# Altium PCB boardR2.PcbDoc
Units mil, origin at the board's own origin, x right, y up, seen from the top; angles counter-clockwise.
Board outline 2162 x 3540 mil, 2 copper layers (Top Layer, Bottom Layer); 41 components, 40 nets, 163 pads, 4 vias.
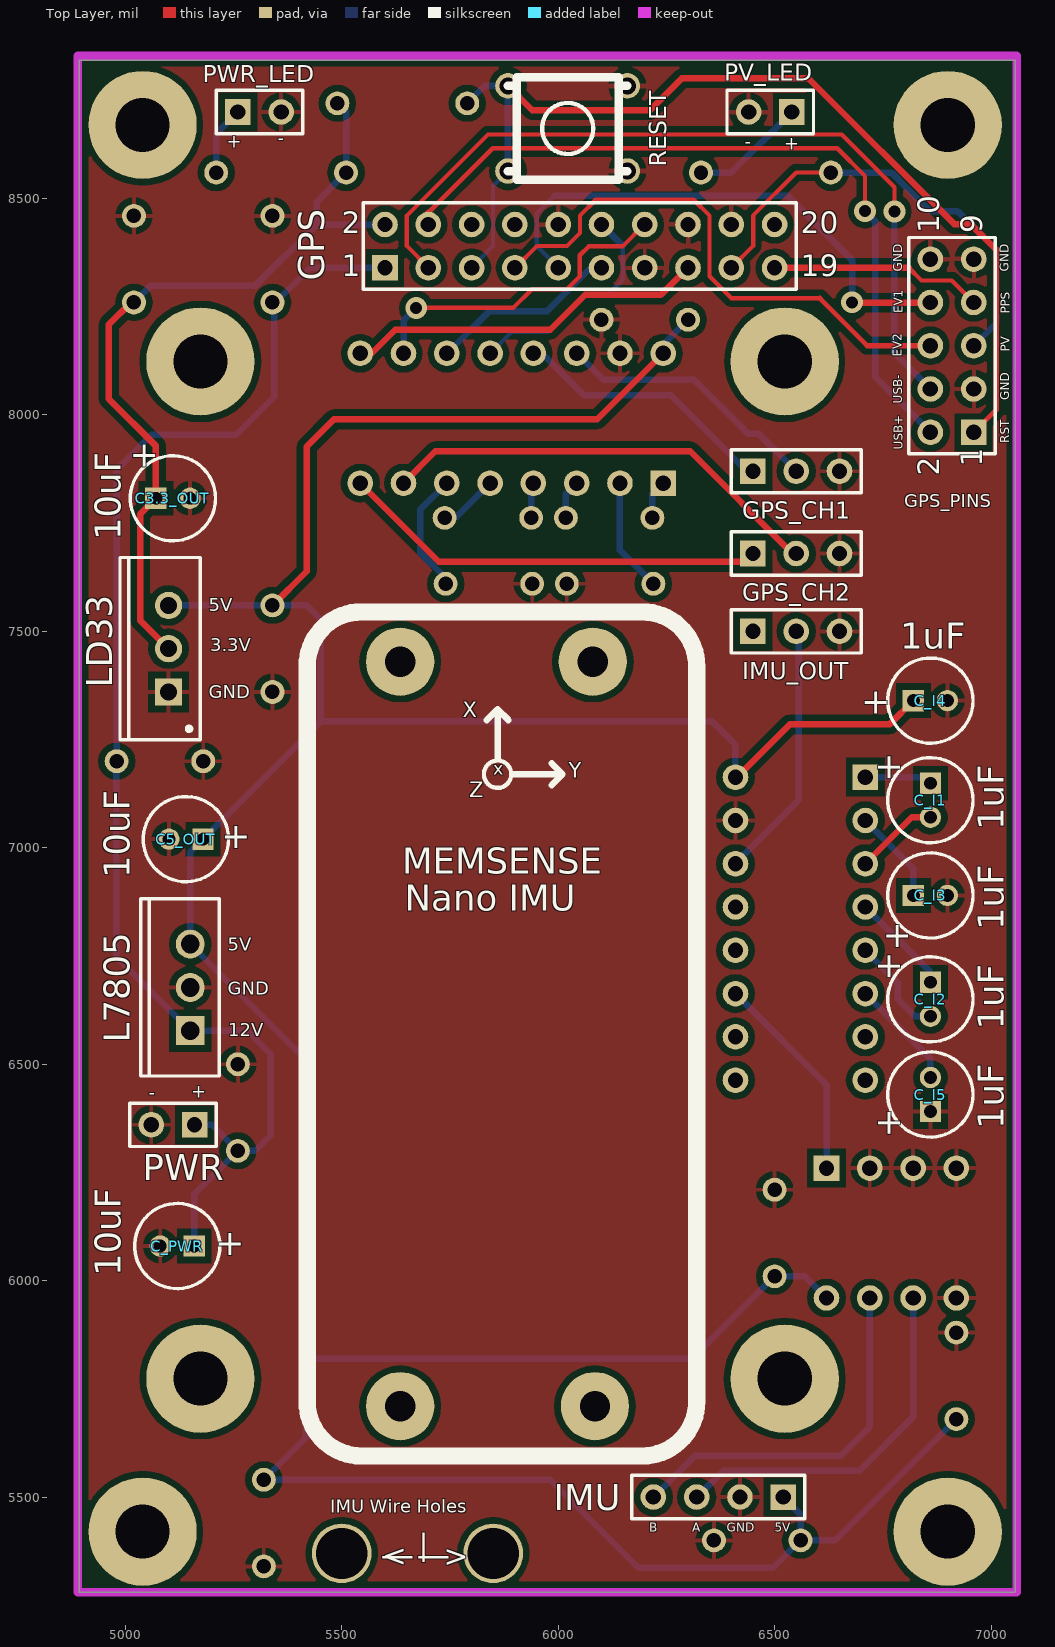
[diagram p0: Top Layer view]
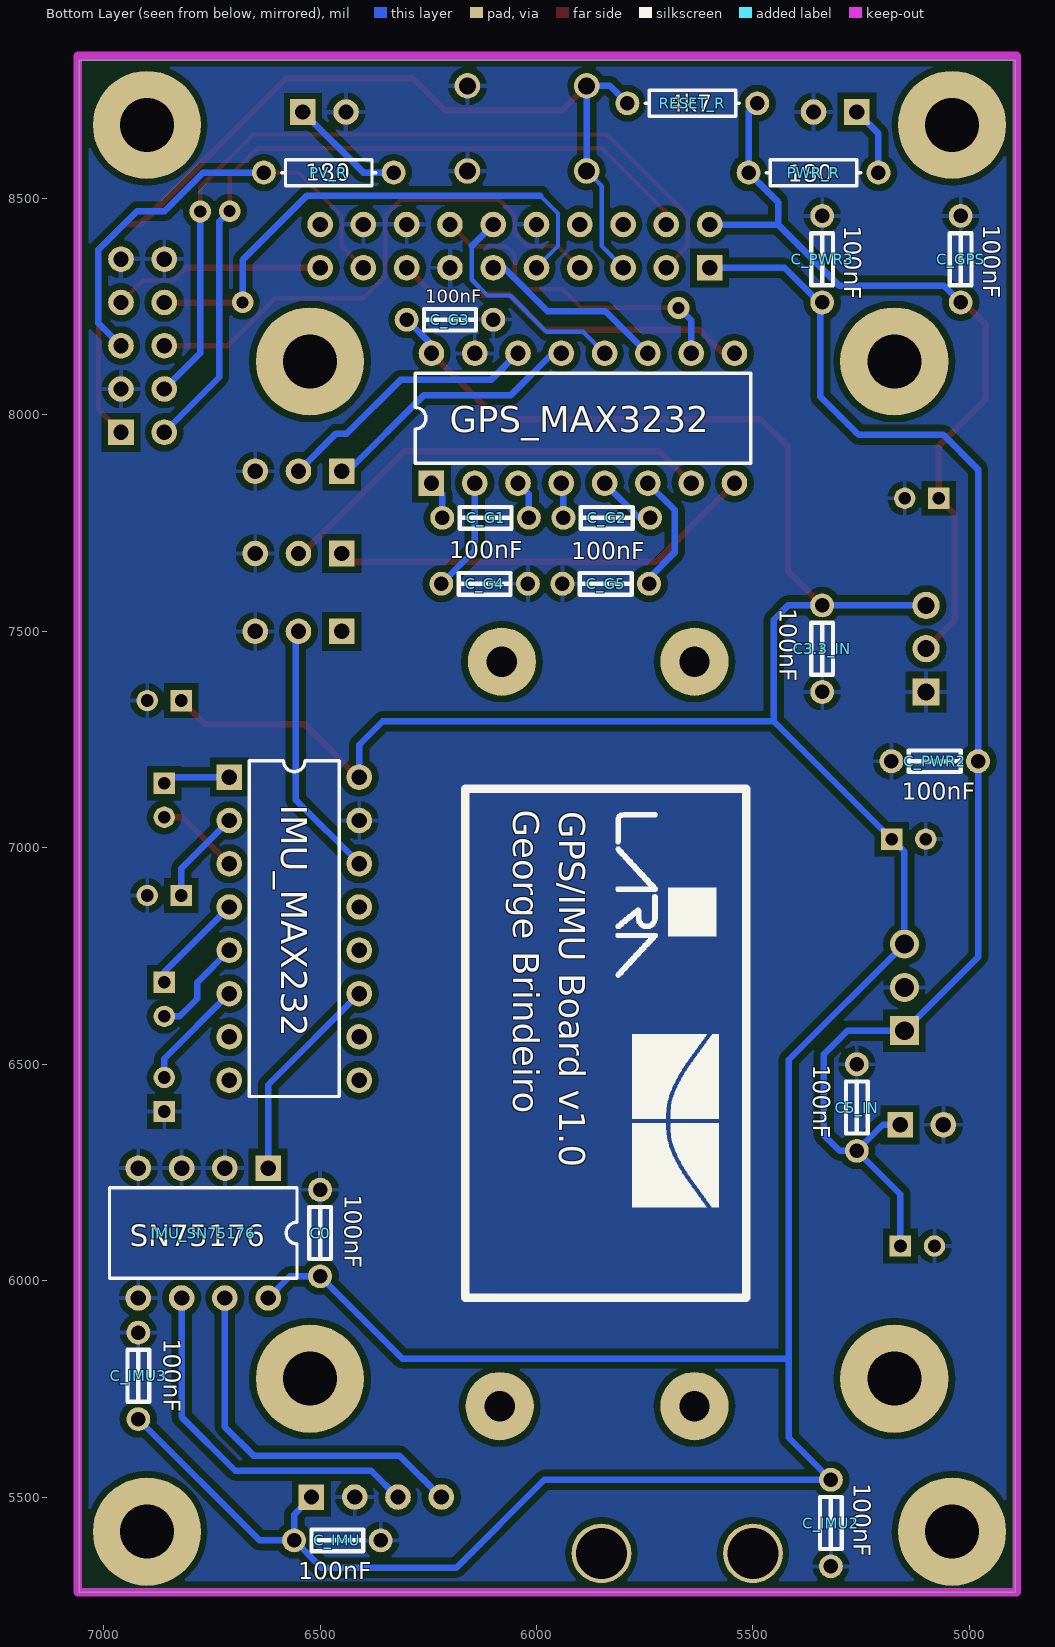
[diagram p1: Bottom Layer view, seen from below]

## Layer stack, top to bottom
Top Layer: signal copper 1.4
Dielectric: dielectric 12.6, FR-4, Dk 4.8
Bottom Layer: signal copper 1.4

## Board outline
4894,5280 7056,5280 7056,8820 4894,8820

## Design rules (kind name [scope] priority, off if disabled: settings)
Clearance [All] p1: gap=15
PolygonConnect [All] p1: connectstyle=Relief reliefconductorwidth=10 reliefentries=4 polygonreliefangle="90 Angle"
RoomDefinition schematic [InComponentClass('schematic')] p1: confinementstyle=ConfineIn formatcopy=TRUE lockcomponents=FALSE outline 7192,5210 7192,8910 4800,8910 4800,5210
RoutingLayers RoutingLayers_1 [All] p1: top layer_v5=TRUE bottom layer_v5=TRUE
RoutingLayers [All] p2: top layer_v5=TRUE bottom layer_v5=TRUE
RoutingTopology RoutingTopology_1 [(InNet('3.3V') OR InNet('5V') OR InNet('12V'))] p1: topology=Starburst
RoutingTopology [All] p2: topology=Shortest
RoutingVias [All] p1: holewidth=28 width=50 viastyle="Through Hole" minholewidth=28 minwidth=50 maxholewidth=28 maxwidth=50
SilkscreenOverComponentPads [All] p1: minsilkscreentomaskgap=10
SolderMaskExpansion [All] p1: expansion=4
TestPointUsage [All] p1: valid=0 allowmultiple=FALSE
Testpoint [All] p1: side=15 testpointundercomponent=TRUE minsize=40 maxsize=100 preferedsize=60 minholesize=0 maxholesize=40 preferedholesize=32 testpointgrid=1 style=1023 order=0123456789
Width Width_1 [(InNet('3.3V') OR InNet('5V') OR InNet('12V'))] p1: maxlimit=20 minlimit=10 preferedwidth=15
Width [All] p2: maxlimit=20 minlimit=10 preferedwidth=12
21 further rules are at their usual default settings.

## Components (designator, comment, footprint, x,y, rotation, side; value= is the part's Value field where it differs from the comment)
C0 "100nF" C_NANO_HOLES 6500,6210 r270 bottom
C3.3_IN "100nF" C_NANO_HOLES 5340,7560 r270 bottom
C3.3_OUT "10uF" B 5110,7807.48 r0 top
C5_IN "100nF" C_NANO_HOLES 5260,6300 r90 bottom
C5_OUT "10uF" B 5140,7020 r180 top
C_G1 "100nF" C_NANO_HOLES 6017.72,7762.44 r0 bottom
C_G2 "100nF" C_NANO_HOLES 5737.72,7762.44 r0 bottom
C_G3 "100nF" C_NANO_HOLES 6100,8220 r0 bottom
C_G4 "100nF" C_NANO_HOLES 6020,7610 r0 bottom
C_G5 "100nF" C_NANO_HOLES 5940,7610 r180 bottom
C_GPS "100nF" C_NANO_HOLES 5020,8460 r270 bottom
C_I1 "1uF" B 6860,7110 r270 top
C_I2 "1uF" B 6860,6650 r270 top
C_I3 "1uF" B 6860,6890 r0 top
C_I4 "1uF" B 6860,7340 r0 top
C_I5 "1uF" B 6860,6430 r90 top
C_IMU "100nF" C_NANO_HOLES 6360,5400 r0 bottom
C_IMU2 "100nF" C_NANO_HOLES 5320,5340 r90 bottom
C_IMU3 "100nF" C_NANO_HOLES 6920,5880 r270 bottom
C_PWR "10uF" B 5120,6080 r180 top
C_PWR2 "100nF" C_NANO_HOLES 5180,7200 r180 bottom
C_PWR3 "100nF" C_NANO_HOLES 5340,8460 r270 bottom
GPS "Header 10X2" HDR2X10 5600,8340 r0 top
GPS_CH1 "MHDR1X3" HDR1X3 6450,7870 r0 top
GPS_CH2 "MHDR1X3" HDR1X3 6450,7680 r0 top
GPS_MAX3232 "MAX3232EEPE" PE16 5892.72,7992.44 r180 bottom
GPS_PINS "Header 5X2" HDR2X5 6960,7960 r90 top
IMU "Header 4" HDR1X4 6520,5500 r180 top
IMU_MAX232 "MAX232ACPE" PE16A 6559.69,6813.15 r270 bottom
IMU_OUT "MHDR1X3" HDR1X3 6450,7500 r0 top
IMU_SN75176 "SN75176" P008 6770,6110 r0 bottom
L7805 "L7805ACV" TO220ABN 5150,6677.48 r90 top
LD33 "LD33V" T03B 5100,7460 r90 top
PV_LED "LED" HDR1X2 6540,8700 r180 top
PV_R "180" AXIAL-0.3 6480,8560 r0 bottom
PWR "Header 2" HDR1X2 5160,6360 r180 top
PWR_LED "LED" HDR1X2 5260,8700 r0 top
PWR_R "180" AXIAL-0.3 5360,8560 r0 bottom
RESET "SW-PB" PUSHBUTTON 6140,8780 r180 top
RESET_R "4k7" AXIAL-0.3 5640,8720 r180 bottom
? "Comment" MEMSENSE_NANO_IMU 5860,6570 r0 top

## Footprints (in the part's own frame and the unit in brackets; to place one, negate y for a bottom-side part, rotate by r counter-clockwise, add the part's x,y. Pads: shape width x height; smd on the part's side, far side on the other; paste and mask are expansions set on the pad)
AXIAL-0.3 [mm] "Resistor; 2 Leads"
  round 1.4 hole 0.85: 1(-3.81,0) 2(3.81,0)
  silkscreen extent -2.77,-0.76 2.77,0.76
B [mm] "Capacitor, Electrolytic, Radial; Body 5 x 6.8 mm (Dia.xH typ); Pin Spacing 2 mm (typ)"
  rect 1.25x1.25 hole 0.75: 1(-1,0)
  round 1.25 hole 0.75: 2(1,0)
  silkscreen extent -2.5,-2.5 2.5,2.5
C_NANO_HOLES [mm] "C_NANO com furos maiores"
  round 1.4 hole 0.85: 1(0,0) 2(5.08,0)
  silkscreen extent 1.02,-0.64 4.06,0.63
HDR1X2 [mm] "Connector; Header; 2 Position"
  rect 1.5x1.5 hole 0.9: 1(0,0)
  round 1.5 hole 0.9: 2(2.54,0)
  silkscreen extent -1.27,-1.27 3.81,1.27
HDR1X3 [mm] "Connector; Header; 3 Position"
  rect 1.5x1.5 hole 0.9: 1(0,0)
  round 1.5 hole 0.9: 2(2.54,0) 3(5.08,0)
  silkscreen extent -1.27,-1.27 6.35,1.27
HDR1X4 [mm] "Connector; Header; 4 Position"
  rect 1.5x1.5 hole 0.9: 1(0,0)
  round 1.5 hole 0.9: 2(2.54,0) 3(5.08,0) 4(7.62,0)
  silkscreen extent -1.27,-1.27 8.89,1.27
HDR2X5 [mm] "Connector; Header; 5x2 Position"
  rect 1.5x1.5 hole 0.9: 1(0,0)
  round 1.5 hole 0.9: 2(0,2.54) 3(2.54,0) 4(2.54,2.54) 5(5.08,0) 6(5.08,2.54) 7(7.62,0) 8(7.62,2.54) 9(10.16,0) 10(10.16,2.54)
  silkscreen extent -1.27,-1.27 11.43,3.81
HDR2X10 [mm] "Connector; Header; 10x2 Position"
  rect 1.5x1.5 hole 0.9: 1(0,0)
  round 1.5 hole 0.9: 2(0,2.54) 3(2.54,0) 4(2.54,2.54) 5(5.08,0) 6(5.08,2.54) 7(7.62,0) 8(7.62,2.54) 9(10.16,0) 10(10.16,2.54) 11(12.7,0) 12(12.7,2.54) 13(15.24,0) 14(15.24,2.54) 15(17.78,0) 16(17.78,2.54) 17(20.32,0) 18(20.32,2.54) 19(22.86,0) 20(22.86,2.54)
  silkscreen extent -1.27,-1.27 24.13,3.81
MEMSENSE_NANO_IMU [mil]
  round 157.48 hole 70: 0(-225,860) 1(220,860) 2(-225,-860) 3(225,-860)
  silkscreen extent -440,-975 460,975
P008 [mm] "DIP; 8 Leads; Row Spacing 7.62 mm; Pitch 2.54 mm"
  rect 1.5x1.5 hole 0.9: 1(-3.81,-3.81)
  round 1.5 hole 0.9: 2(-1.27,-3.81) 3(1.27,-3.81) 4(3.81,-3.81) 5(3.81,3.81) 6(1.27,3.81) 7(-1.27,3.81) 8(-3.81,3.81)
  silkscreen extent -5.5,-2.65 5.5,2.65
PE16 [mm] "DIP; 16 Leads; Row Spacing 7.62 mm; Pitch 2.54 mm"
  rect 1.5x1.5 hole 0.9: 1(-8.89,-3.81)
  round 1.5 hole 0.9: 2(-6.35,-3.81) 3(-3.81,-3.81) 4(-1.27,-3.81) 5(1.27,-3.81) 6(3.81,-3.81) 7(6.35,-3.81) 8(8.89,-3.81) 9(8.89,3.81) 10(6.35,3.81) 11(3.81,3.81) 12(1.27,3.81) 13(-1.27,3.81) 14(-3.81,3.81) 15(-6.35,3.81) 16(-8.89,3.81)
  silkscreen extent -9.85,-2.65 9.85,2.65
PE16A [mm] "DIP; 16 Leads; Row Spacing 7.62 mm; Pitch 2.54 mm"
  rect 1.5x1.5 hole 0.9: 1(-8.89,-3.81)
  round 1.5 hole 0.9: 2(-6.35,-3.81) 3(-3.81,-3.81) 4(-1.27,-3.81) 5(1.27,-3.81) 6(3.81,-3.81) 7(6.35,-3.81) 8(8.89,-3.81) 9(8.89,3.81) 10(6.35,3.81) 11(3.81,3.81) 12(1.27,3.81) 13(-1.27,3.81) 14(-3.81,3.81) 15(-6.35,3.81) 16(-8.89,3.81)
  silkscreen extent -9.85,-2.65 9.85,2.65
PUSHBUTTON [mm]
  round 1.5 hole 1: 1(-0.5,5.5) 1(-0.5,0.5) 2(6.5,5.5) 2(6.5,0.5)
  silkscreen extent -0.5,0 6.5,6
T03B [mm] "TO, Thru-Hole, Vertical, Heatsink Mounted; 3 In-Line Leads; Pitch 2.54 mm"
  rect 1.6x1.6 hole 1: 1(-2.54,0)
  round 1.6 hole 1: 2(0,0) 3(2.54,0)
  silkscreen extent -5.35,-1.85 5.35,2.85, body extent -5.4,-1.9 5.4,2.9, height 19.4
TO220ABN [mm] "TO, Thru-Hole, Vertical, Heatsink Mounted; 3 In-Line Leads; Pitch 2.54 mm; Pin sequence 1, 3, 2"
  rect 1.7x1.7 hole 1.1: 1(-2.54,0)
  round 1.7 hole 1.1: 2(2.54,0) 3(0,0)
  silkscreen extent -5.2,-1.7 5.2,2.9

## Part data
C0 C3.3_IN C5_IN C_G1 C_G2 C_G3 C_G4 C_G5 C_GPS C_IMU C_IMU2 C_IMU3 C_PWR2 C_PWR3: library part Cap, "Capacitor"
C3.3_OUT C5_OUT C_I1 C_I2 C_I3 C_I4 C_I5 C_PWR: library part "Cap Pol1", "Polarized Capacitor (Radial)"
GPS: "Header, 10-Pin, Dual row"
GPS_CH1 GPS_CH2 IMU_OUT: "Header, 3-Pin"
GPS_MAX3232: "±15kV ESD-Protected, 3.0V to 5.5V, Low-Power, up to 250kbps, True RS-232 Transceiver"
GPS_PINS: "Header, 5-Pin, Dual row"
IMU: "Header, 4-Pin"
IMU_MAX232: "+5V Powered, Multi-Channel RS-232 Driver/Receiver"
IMU_SN75176: library part SN75176AP, "Differential Bus Transceiver"
L7805: "Precision 1A Regulator"
LD33: library part LM1117T-3.3, "800mA Low-Dropout Linear Regulator"
PV_LED PWR_LED: library part LED0, "Typical INFRARED GaAs LED"
PV_R PWR_R RESET_R: library part Res1, "Resistor"
PWR: "Header, 2-Pin"
RESET: "Switch"

## Free pads (board coordinates)
  round 250 hole 125: 0(5040,8670) 0(5173.39,8123.58) 1(6523.39,8123.58) 1(6900,8670) 2(6523.39,5773.58) 2(6900,5420) 3(5040,5420) 3(5173.39,5773.58)
  round 137.8 hole 118.11: ""(5500,5370) ""(5850,5370)

## Via types
v1: diameter 50, hole 28, Top Layer to Bottom Layer, 4 vias

## Nets (pads, with @x,y where several pads share a name; then routed paths per layer and width w, separated by ;. In a path a pad name is that pad's centre, name@x,y a point inside that pad or via, vN(x,y) a via of type N, cw(c..) or ccw(c..) an arc to the next point about the centre after c; other vN are vias at no path point)
3.3V: C3.3_OUT.1 C_GPS.2 GPS.2 LD33.2 PWR_R.2 RESET_R.2 | length 1879.6
  Top Layer w15: C_GPS.2@5013,8260 4962,8209 4962,8037 5070.63,7928.37 C3.3_OUT.1 5034,7770.85 5034,7526 LD33.2
  Bottom Layer w15: C_GPS.2 5058.96,8298.96 5300.96,8298.96 5442,8440 ; RESET_R.2 5510,8700 PWR_R.2 5442,8492 5442,8440 ; GPS.2 5442,8440
5V: C0.2 C3.3_IN.1 C5_OUT.1 C_G3.2 C_I4.1 C_IMU2.2 C_IMU3.2 C_IMU.2 GPS_MAX3232.16 IMU.1 IMU_MAX232.16 IMU_SN75176.8 L7805.2 LD33.3 | length 8827.2
  Top Layer w15: C3.3_IN.1 5419,7639 5419,7927 5482,7990 6090.28,7990 GPS_MAX3232.16 ; IMU_MAX232.16 6413.15,7163.15 6535,7285 6765.63,7285 C_I4.1
  Bottom Layer w15: LD33.3 C3.3_IN.1 5419,7560 5452,7527 5452,7292.63 ; GPS_MAX3232.16 6242.72,8162.72 C_G3.2 ; IMU_MAX232.16 6409.69,7238.31 6355.37,7292.63 5452,7292.63 ; IMU.1 6560,5460 C_IMU.2 ; IMU_SN75176.8 6570,6010 C0.2 6310,5820 5417,5820 ; C_IMU3.2 6640,5400 C_IMU.2 ; 5417,5820 5417,6510.48 L7805.2 5150,6990.63 C5_OUT.1 5452,7292.63 ; 5417,5820 5417,5637 C_IMU2.2 5982,5540 6185,5337 6497,5337 C_IMU.2
12V: C5_IN.1 C_PWR2.2 C_PWR3.2 C_PWR.1 GPS.1 L7805.1 PWR.1 | length 3183.6
  Bottom Layer w15: C_PWR.1 5159.37,6199.37 C5_IN.1 ; PWR.1 5200,6360 C5_IN.1 ; C_PWR3.2@5339,8262 5340.5,8260.5 5341,8260 C_PWR3.2 ; GPS.1 5427,8340 5344,8257 5344,8042 5256,7954 5060,7954 4980,7874 C_PWR2.2 4979,7199 4979,6748.48 L7805.1 5281.52,6577.48 5336,6523 5336,6336 5300,6300 C5_IN.1
GND: C0.1 C3.3_IN.2 C3.3_OUT.2 C5_IN.2 C5_OUT.2 C_G3.1 C_G4.1 C_G5.1 C_GPS.1 C_I3.2 C_I4.2 C_I5.1 C_IMU2.1 C_IMU3.1 C_IMU.1 C_PWR2.1 C_PWR3.1 C_PWR.2 GPS.10 GPS.13 GPS.16 GPS.18 GPS_CH1.3 GPS_CH2.3 GPS_MAX3232.15 GPS_PINS.3 GPS_PINS.9 GPS_PINS.10 IMU.2 IMU_MAX232.15 IMU_OUT.3 IMU_SN75176.2 IMU_SN75176.3 IMU_SN75176.4 IMU_SN75176.5 L7805.3 LD33.1 PV_LED.2 PWR.2 PWR_LED.2 RESET.1
GPS_CAN2_RX: GPS.8
GPS_CAN2_TX: GPS.20
GPS_COM1_RX: GPS.12 GPS_MAX3232.12 | length 526.2
  Bottom Layer w10: GPS_MAX3232.12 5892.25,8191.97 5976.85,8191.97 6060.88,8276 6113,8276 6149.53,8312.53 6149.53,8390.47
  Bottom Layer w15: GPS_MAX3232.12 GPS_MAX3232.12@5843.66,8142.44 ; GPS.12 6149.53,8390.47
GPS_COM1_TX: GPS.11 GPS_MAX3232.11 | length 439.1
  Bottom Layer w15: GPS_MAX3232.11 5743.66,8142.44 5841.22,8240 5975,8240 6075,8340 GPS.11
GPS_COM2_RX: GPS.15 GPS_MAX3232.9 | length 839.1
  Top Layer w15: GPS_MAX3232.9 5569.14,8142.44 5623.7,8197 5981.88,8197 6062.38,8277.5 6237.5,8277.5 GPS.15
GPS_COM2_TX: GPS.14 GPS_MAX3232.10 | length 753.7
  Top Layer w10: v1(5672,8247) 5673,8248 5897,8248 5939.47,8290.47 6020.52,8290.47 6050,8319.96 6050,8369 6070.53,8389.53 6148.58,8389.53 6199.06,8440 GPS.14
  Bottom Layer w15: GPS_MAX3232.10 5642.72,8218.72 v1@5671.5,8247.5
GPS_EVENT1: GPS.9 GPS_PINS.8 | length 1238.2
  Top Layer w15: v1(6679,8260) 6680,8259 GPS_PINS.8@6859,8259
  Bottom Layer w10: 5992,8507 5950.47,8465.47 5950.47,8390.47 6000,8340.94 GPS.9
  Bottom Layer w15: 5991,8507 5992,8507 6530,8507 6679,8358 v1(6679,8260) ; GPS.9 6000,8340.94 GPS.9@6000,8345.4
GPS_EVENT2: GPS.7 GPS_PINS.6 | length 1270.2
  Top Layer w10: GPS.7 5900.94,8340 5951.42,8390.47 6020.52,8390.47 6050.47,8420.43 6050.47,8460.51 6086.96,8497 6313.04,8497 6349.53,8460.51 6349.53,8320.43 6400.38,8269.58 6604.36,8269.58
  Top Layer w12: 6604.36,8269.58 6713.95,8160 GPS_PINS.6
GPS_PPS: GPS.19 GPS_PINS.7 | length 493.1
  Top Layer w10: 6809.96,8340 6839.49,8310.47 6909.53,8310.47 GPS_PINS.7
  Top Layer w15: GPS.19 6809.96,8340
GPS_PV: GPS.17 GPS_PINS.5 PV_R.2 | length 1062.1
  Top Layer w10: GPS.17 6450.47,8390.47 6450.47,8460.51 6549.96,8560 PV_R.2
  Bottom Layer w15: GPS.17 GPS.17@6400,8340.94 ; PV_R.2 6769.94,8560 6804.94,8525 6858.94,8471 6922.58,8471 7012.03,8381.55 7012.03,8212.03 GPS_PINS.5
GPS_RESETIN: GPS.5 GPS_PINS.1 RESET.2 RESET_R.1 | length 2355.2
  Top Layer w12: GPS_PINS.1 7012.03,8012.03 7012.03,8381.55
  Top Layer w15: RESET.2@5884.09,8760.32 5940.41,8704 6212,8704 6286,8778 6578,8778 6915,8441 6952.58,8441 7012.03,8381.55
  Bottom Layer w10: GPS.5@5800,8340.94 5849.53,8390.47 5849.53,8528.9 RESET.2@5884.09,8563.46
  Bottom Layer w15: RESET_R.1 5830.32,8760.32 5884.09,8760.32 RESET.2@5884.09,8563.46 ; GPS.5 GPS.5@5800,8340.94
GPS_USB_D+: GPS.4 GPS_PINS.2 | length 1781.7
  Top Layer w10: GPS.4@5700,8467 5849,8616 6644.79,8616 6709,8551.79 v1(6709,8471)
  Top Layer w15: GPS.4 GPS.4@5700,8467 ; v1@6709,8468 v1(6709,8471)
  Bottom Layer w15: v1(6709,8471) 6733,8447 6733,8087 GPS_PINS.2
GPS_USB_D-: GPS.3 GPS_PINS.4 | length 1896.3
  Top Layer w10: GPS.3@5700,8340.94 5650.47,8390.47 5650.47,8460.52 5837.96,8648 6655.22,8648 6777,8526.22 v1(6777,8470)
  Top Layer w15: GPS.3 GPS.3@5700,8340.94
  Bottom Layer w15: v1(6777,8470) 6777,8143 GPS_PINS.4
GPS_VARF: GPS.6
IMU_HRS_A: IMU.3 IMU_SN75176.6 | length 851.6
  Bottom Layer w15: IMU.3 6320.94,5500 6381.94,5561 6696,5561 6820,5685 IMU_SN75176.6
IMU_HRS_B: IMU.4 IMU_SN75176.7 | length 865.1
  Bottom Layer w15: IMU.4 6220.94,5500 6316.94,5596 6654,5596 6720,5662 IMU_SN75176.7
IMU_TX: IMU_MAX232.11 IMU_SN75176.1 | length 490.3
  Bottom Layer w15: IMU_MAX232.11 6620,6452.84 IMU_SN75176.1
J1_RX: GPS_CH1.2 GPS_MAX3232.14 | length 632.8
  Bottom Layer w15: GPS_MAX3232.14 6043.66,8142.44 6105.1,8081 6314.43,8081 6438.43,7957 6463,7957 GPS_CH1.2 GPS_CH1.2@6537.34,7870
J1_TX: GPS_CH1.1 GPS_MAX3232.13 | length 620.1
  Bottom Layer w15: GPS_MAX3232.13 5962.56,8142.44 6060,8045 6261,8045 6436,7870 GPS_CH1.1
J2_RX: GPS_CH2.2 GPS_MAX3232.7 | length 1035.5
  Top Layer w15: GPS_MAX3232.7 5716.28,7916 6305,7916 6541,7680 GPS_CH2.2
J2_TX: GPS_CH2.1 GPS_MAX3232.8 | length 990.4
  Top Layer w15: GPS_MAX3232.8 5542.72,7842.28 5724,7661 6431,7661 GPS_CH2.1
J3_RX: IMU_MAX232.14 IMU_OUT.2 | length 599.9
  Bottom Layer w15: IMU_MAX232.14 6409.69,6964.1 6556,7110.41 6556,7494 IMU_OUT.2
NetC_G1_1: C_G1.1 GPS_MAX3232.3 | length 90.4
  Bottom Layer w15: C_G1.1 6017.72,7817.44 GPS_MAX3232.3
NetC_G1_2: C_G1.2 GPS_MAX3232.1 | length 90.4
  Bottom Layer w15: C_G1.2 6217.72,7817.44 GPS_MAX3232.1
NetC_G2_1: C_G2.1 GPS_MAX3232.5 | length 138.1
  Bottom Layer w15: C_G2.1 5762.72,7762.44 GPS_MAX3232.5
NetC_G2_2: C_G2.2 GPS_MAX3232.4 | length 75
  Bottom Layer w15: C_G2.2 GPS_MAX3232.4@5937.72,7837.44
NetC_G4_2: C_G4.2 GPS_MAX3232.2 | length 264.5
  Bottom Layer w15: GPS_MAX3232.2 6142.72,7687.28 C_G4.2
NetC_G5_2: C_G5.2 GPS_MAX3232.6 | length 282.4
  Bottom Layer w15: C_G5.2 5740,7623 5681,7682 5681,7780.72 GPS_MAX3232.6
NetC_I1_1: C_I1.1 IMU_MAX232.1 | length 156
  Bottom Layer w15: IMU_MAX232.1 6846.22,7163.15 C_I1.1
NetC_I1_2: C_I1.2 IMU_MAX232.3 | length 194.8
  Top Layer w15: IMU_MAX232.3 6817.17,7070.63 C_I1.2
NetC_I2_1: C_I2.1 IMU_MAX232.4 | length 236
  Bottom Layer w15: IMU_MAX232.4 6860,6712.83 C_I2.1
NetC_I2_2: C_I2.2 IMU_MAX232.5 | length 237.9
  Bottom Layer w15: IMU_MAX232.5@6709.69,6760.95 IMU_MAX232.5 6784,6688.84 6784,6651 6824.37,6610.63 C_I2.2
NetC_I3_1: C_I3.1 IMU_MAX232.2 | length 219.1
  Bottom Layer w15: IMU_MAX232.2 6820.63,6952.2 C_I3.1
NetC_I5_2: C_I5.2 IMU_MAX232.6 | length 256
  Bottom Layer w15: IMU_MAX232.6 6860,6512.83 C_I5.2
NetPV_LED_1: PV_LED.1 PV_R.1 | length 268
  Bottom Layer w15: PV_R.1 6400,8560 PV_LED.1
NetPWR_LED_1: PWR_LED.1 PWR_R.1 | length 160.7
  Bottom Layer w15: PWR_R.1 5210,8650 PWR_LED.1
pads on no net: ?.0 ?.1 ?.2 ?.3 IMU_MAX232.7 IMU_MAX232.8 IMU_MAX232.9 IMU_MAX232.10 IMU_MAX232.12 IMU_MAX232.13 IMU_OUT.1

## Polygon pours and split planes (outlines as drawn)
GND on Top Layer "Top Layer-GND" (solid, remove dead copper): 4887,8831 7061,8831 7059,8829 7059,5280 4891,5280 4887,5284 4887,8827 4885,8829
GND on Bottom Layer "Bottom Layer-GND" (solid, remove dead copper): 4891,8827 4896,8832 7056,8832 7056,5285 7054,5283 7052,5281 4889,5281 4891,5283 4891,8832

## Keep-outs
Keep-Out Layer:
  lines w19.68: 4890,5280 4890,6354.29 4890,8830 7060,8830 7060,5280 4890,5280

## Silkscreen, mask and mechanical layers (free items; w line width, h text height)
Top Overlay:
  text "-" at 5367,8647 h30 r180
  text "+" at 5269,8644 h30 r180
  text "-" at 6446,8639 h30 r180
  text "+" at 6557,8639 h30 r180
  text "GND" at 6795,8331 h20 r90
  text "GND" at 7041,8331 h20 r90
  text "EV1" at 6796,8235 h20 r90
  text "PPS" at 7043,8234 h20 r90
  text "PV" at 7043,8146 h20 r90
  text "EV2" at 6794,8134 h20 r90
  text "GND" at 7042,8034 h20 r90
  text "USB-" at 6795,8026 h20 r90
  text "RST" at 7042,7935 h20 r90
  text "USB+" at 6796,7920 h20 r90
  text "5V" at 5193,7546 h30
  text "3.3V" at 5196,7454 h30
  text "GND" at 5193,7345 h30
  text "+" at 5152,6422 h30
  text "-" at 5054,6420 h30
  text "IMU Wire Holes" at 5474,5464 h30
  text "B" at 6210,5420 h20
  text "A" at 6310,5420 h20
  text "GND" at 6390,5420 h20
  text "5V" at 6500,5420 h20
  text "__" at 5595,5374 h50
  text "__" at 5678,5374 h50
  text "|" at 5678,5366 h50
  text "<" at 5594,5341 h50
  text ">" at 5736,5340 h50
Bottom Overlay:
  drawing of 1222 lines, arcs and shapes, not listed
  text "George Brindeiro" at 6054,7088 h60 r90
  text "GPS/IMU Board v1.0" at 5948,7084 h60 r90

## Text inside footprints (layer, text, board x,y; h text height)
C3.3_OUT: Top Overlay "+" at 5010,7880 h59.06
C5_OUT: Top Overlay "+" at 5290,7050 h59.06 r180
C_I1: Top Overlay "+" at 6740,7220 h59.06 r270
C_I2: Top Overlay "+" at 6740,6760 h59.06 r270
C_I3: Top Overlay "+" at 6750,6770 h59.06
C_I4: Top Overlay "+" at 6700,7310 h59.06
C_I5: Top Overlay "+" at 6790,6330 h59.06 r90
C_PWR: Top Overlay "+" at 5276.5,6109.53 h59.06 r180
GPS: Top Overlay "20" at 6560,8420 h50; Top Overlay "19" at 6560,8320 h50; Top Overlay "1" at 5500,8320 h50; Top Overlay "2" at 5500,8420 h50
GPS_PINS: Top Overlay "10" at 6880,8420 h50 r90; Top Overlay "9" at 6980,8420 h50 r90; Top Overlay "1" at 6980,7880 h50 r90; Top Overlay "2" at 6880,7860 h50 r90
L7805: Top Overlay "12V" at 5238,6565 h30; Top Overlay "5V" at 5237,6762 h30; Top Overlay "GND" at 5237,6661 h30
?: Top Overlay "Z" at 5795,7105 h60; Top Overlay "Y" at 6025,7150 h60; Top Overlay "X" at 5780,7290 h60; Top Overlay "x" at 5850,7158 h50; Top Overlay "MEMSENSE" at 5640,6940 h60; Top Overlay "Nano IMU" at 5645.07,6855 h60